# Altium PCB PCB1.PcbDoc
Units mm, origin at the board's own origin, x right, y up, seen from the top; angles counter-clockwise.
Board outline 132.49 x 90.93 mm, 2 copper layers (Top Layer, Bottom Layer); 47 components, 55 nets, 179 pads, 36 vias.
Unrouted connection lines stored in the file: 1.
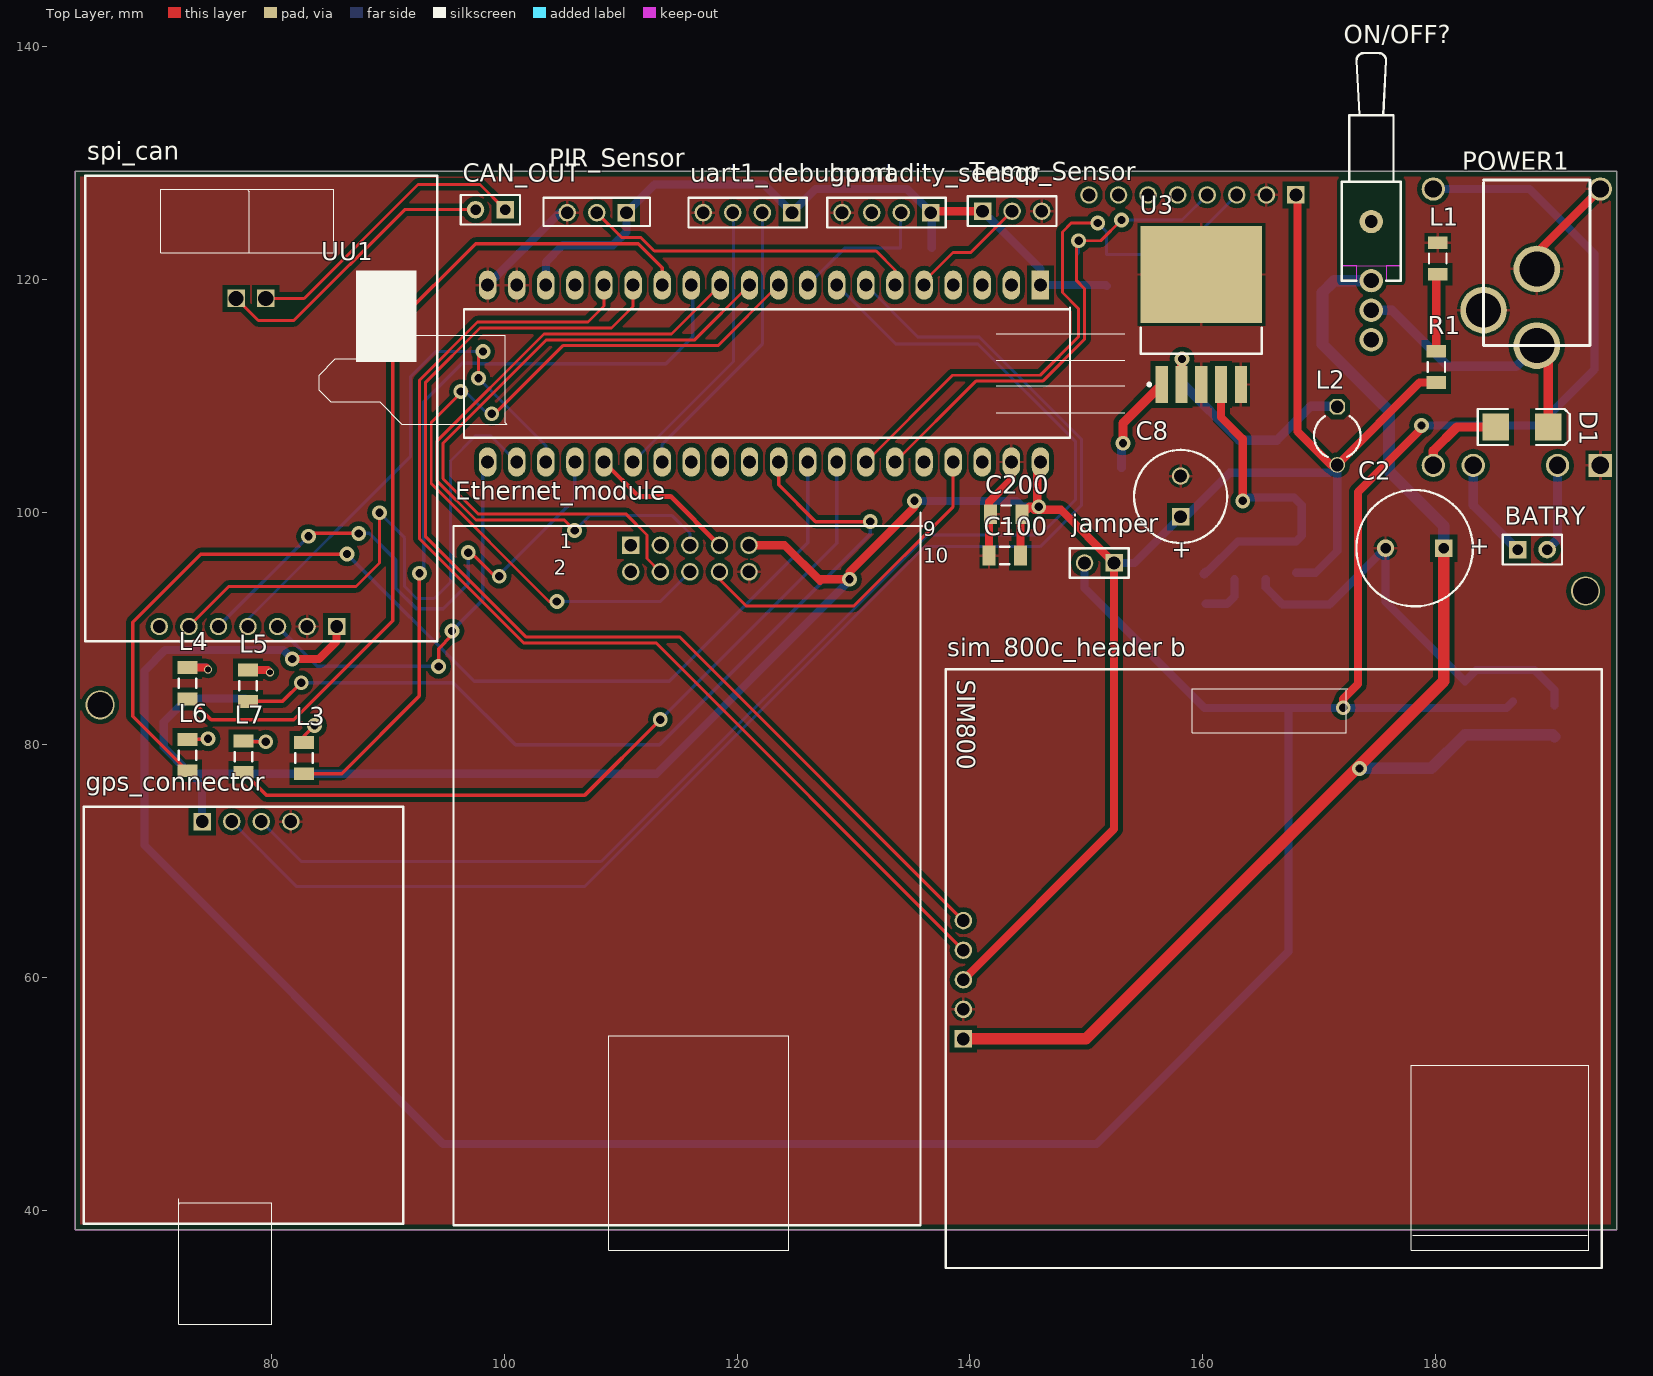
[diagram p0: Top Layer view]
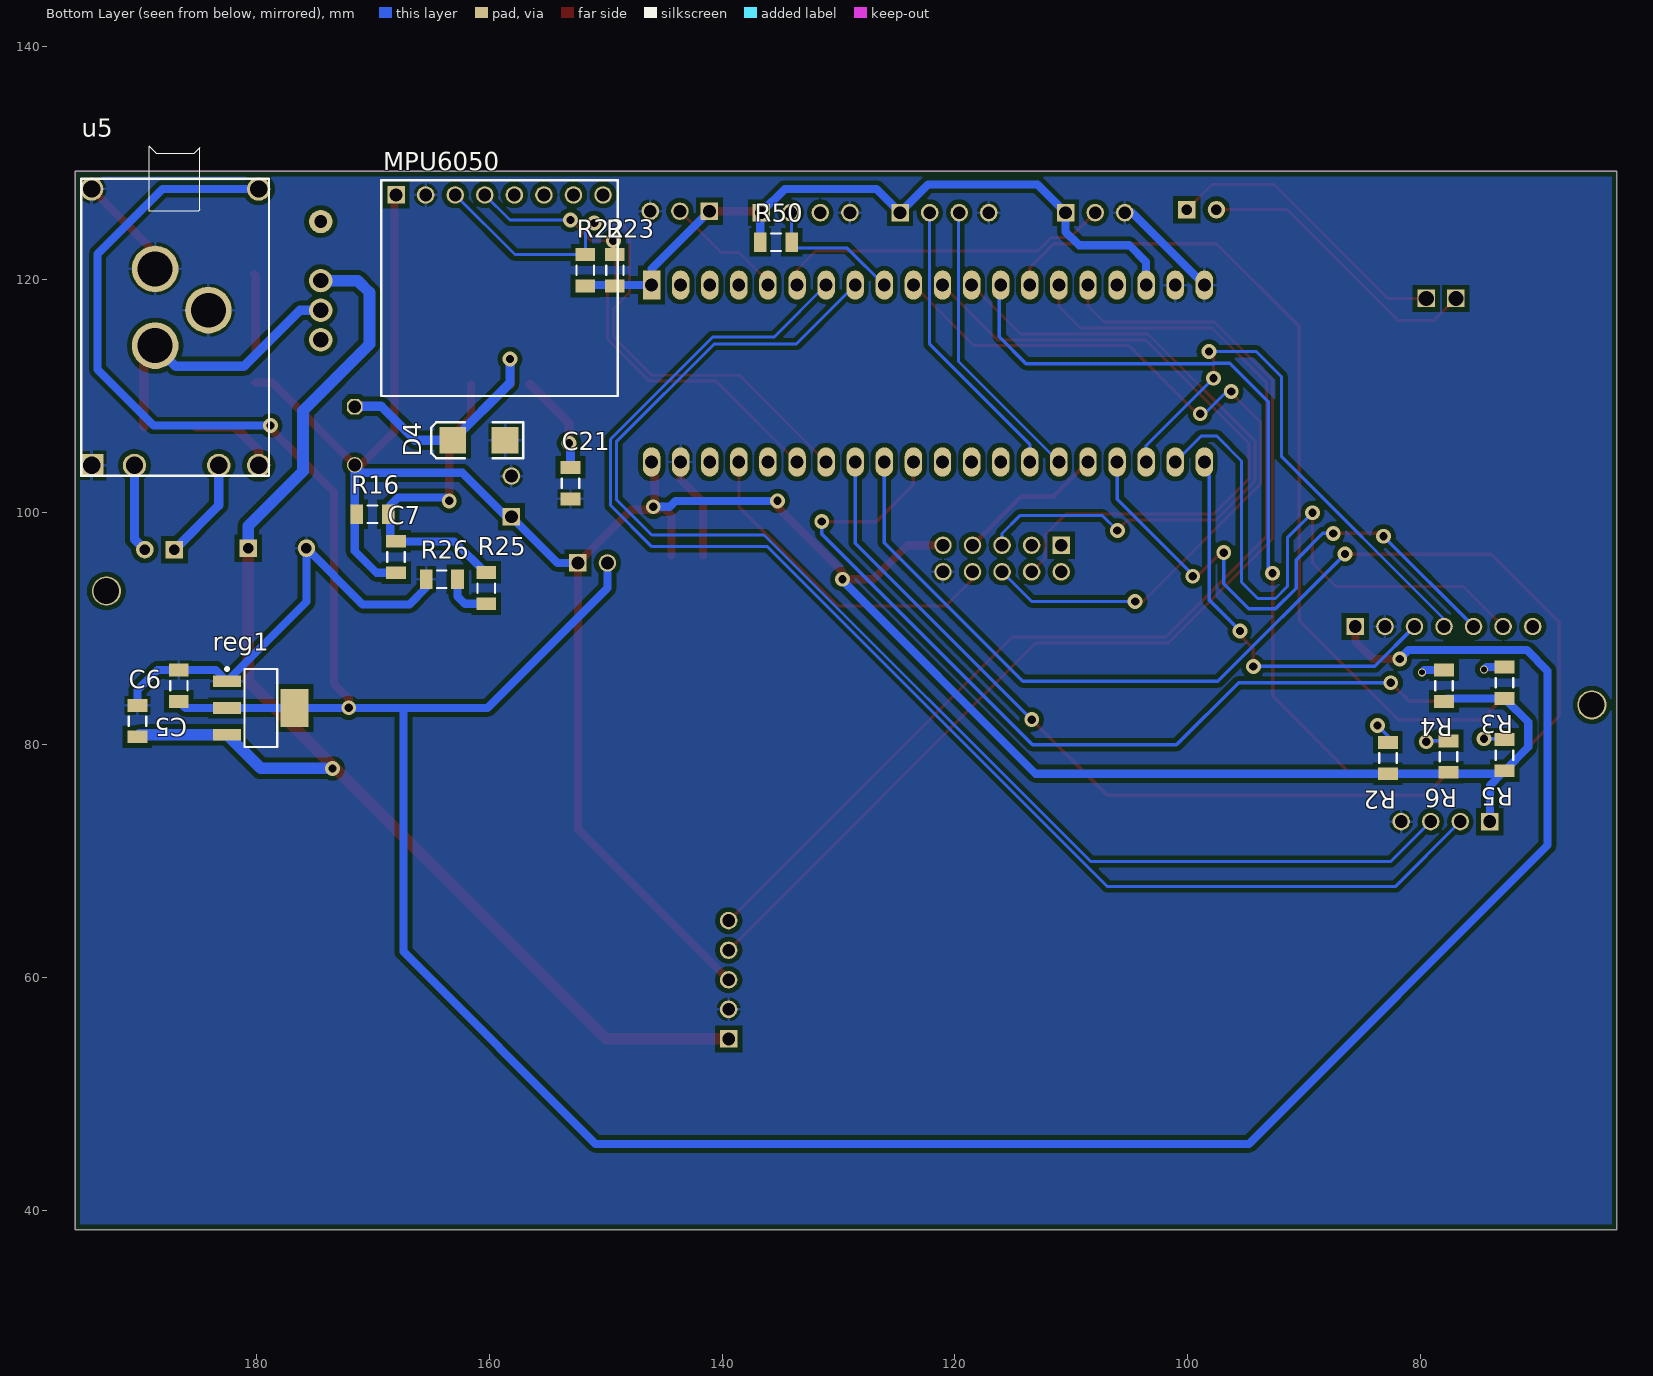
[diagram p1: Bottom Layer view, seen from below]

## Layer stack, top to bottom
Top Solder: solder mask 0.0102, Solder Resist, Dk 3.5
Top Layer: signal copper 0.0356
Dielectric 1: dielectric 0.32, FR-4, Dk 4.8
Bottom Layer: signal copper 0.0356
Bottom Solder: solder mask 0.0102, Solder Resist, Dk 3.5

## Board outline
63.119,38.354 63.119,129.286 195.608,129.286 195.608,38.354

## Design rules (kind name [scope] priority, off if disabled: settings)
Clearance Clearance_2 [InNamedPolygon('1')] p1: gap=0.4 ignorepadtopadclearanceinfootprint=FALSE
Clearance Clearance_1 [InNamedPolygon('Top Layer-No Net')] p2: gap=0.4 ignorepadtopadclearanceinfootprint=FALSE
Clearance [All] p3: gap=0.254 ignorepadtopadclearanceinfootprint=FALSE except(0: Arc-Hole Track-Hole SMDPad-Hole THPad-Hole Via-Hole Fill-Hole Poly-Hole Region-Hole Text-Hole)
PolygonConnect [All] p1: connectstyle=Relief reliefconductorwidth=0.254 reliefentries=4 polygonreliefangle="90 Angle" airgapwidth=0.254
RoutingVias [All] p1: holewidth=0.711 width=1.27 viastyle="Through Hole" minholewidth=0.711 minwidth=1.27 maxholewidth=0.711 maxwidth=1.27
SolderMaskExpansion [All] p1: expansion=0.102
Width Width_1 [InNet('GND') OR InNet('3.3V')   OR InNet('VBAT')  OR InNet('V12')] p1: maxlimit=1 minlimit=0.4 preferedwidth=0.8 minimp=50.000000 maximp=50.000000 favimp=50.000000
Width [All] p2: maxlimit=1 minlimit=0.254 preferedwidth=0.8 minimp=50.000000 maximp=50.000000 favimp=50.000000
30 further rules are at their usual default settings.

## Components (designator, comment, footprint, x,y, rotation, side; value= is the part's Value field where it differs from the comment)
BATRY "BATTRY" HDR1X2#1 187.071,96.774 r0 top
C2 "470uF 16V" F 178.221,96.901 r180 top value=470uF
C5 "Cap Semi" C1206 186.69,85.09 r90 bottom value=22uF
C6 "PC1" C1206 190.246,82.042 r90 bottom value=10uF
C7 "15nF" 1206 168.021,96.139 r270 bottom
C8 "220 μF; 25 V" E 158.115,101.346 r90 top value=100uF
C21 "100nF" 1206 153.035,102.489 r270 bottom
C100 "100nF" 1206 143.002,96.266 r180 top
C200 "100nF" 1206 143.129,99.822 r180 top
CAN_OUT "can_OUT" HDR1X2#1 100.076,125.984 r180 top
D1 "Diode" SMB 187.452,107.315 r0 top
D4 "SM5822" SMB 160.909,106.172 r0 bottom
Ethernet_module "Ethernet_module" ethernet_module 119.38,93.726 r0 top
gps_connector "gps_connector" GPS_PORT_MODULE 74.041,73.406 r0 top
humadity_sensor "humadity_sensor" HDR1X4 136.652,125.73 r180 top
jamper "jamper" HDR1X2#2 152.4,95.631 r180 top
L1 "LED2" C1206 180.213,121.793 r90 top
L2 "68uH 3.1A (47 33)" CAPR5-4X5 171.577,106.553 r270 top value=10mH
L3 "LED2" C1206 82.804,78.867 r270 top
L4 "LED2" C1206 72.771,85.297 r270 top
L5 "LED2" C1206 77.978,85.09 r270 top
L6 "LED2" C1206 72.771,79.121 r270 top
L7 "LED2" C1206 77.597,78.994 r270 top
MPU6050 "MPU6050" mpu6050 168.021,127.254 r180 bottom
ON/OFF? "SW-SPDT" TL36WW15050 174.498,119.888 r90 top
PIR_Sensor "PIR_Sensor" "PIR_MODULE - CONNECTOR" 115.824,125.857 r180 top
POWER1 "POWER" POWERIN 188.715,120.893 r0 top
R1 "1K" 1206 180.086,112.475 r90 top
R2 "330" 1206 82.804,78.867 r90 bottom
R3 "330" 1206 72.771,85.344 r90 bottom
R4 "330" 1206 77.978,85.09 r90 bottom
R5 "330" 1206 72.771,79.121 r90 bottom
R6 "330" 1206 77.597,78.994 r90 bottom
R16 "3.3k; 1%" 1206 170.053,99.822 r180 bottom
R22 "1K" 1206 151.765,120.777 r90 bottom
R23 "1K" 1206 149.225,120.777 r90 bottom
R25 "10k; 1%" 1206 160.274,93.472 r270 bottom
R26 "10k; 1%" 1206 164.084,94.234 r0 bottom
R50 "5.6k" 1206 135.382,123.19 r180 bottom
reg1 "ams1117-5" ams 179.716,83.185 r180 bottom
"sim_800c_header b" "sim_800c_header b" SIM800_MODULE 190.119,62.357 r90 top
spi_can "spi module" SPI_CAN 85.598,90.17 r180 top
Temp_Sensor "Temp_Sensor" HDR1X3 141.097,125.857 r0 top
U3 "LM2596S-ADJ" TS5B_N 159.893,116.967 r90 top
u5 "charger" CHARGER 192.151,108.839 r180 bottom
uart1_debugport "uart1_debugport" HDR1X4 124.714,125.73 r180 top
UU1 "STM32F103C8T6" header_board_st_40 146.071,119.507 r270 top

## Footprints (in the part's own frame and the unit in brackets; to place one, negate y for a bottom-side part, rotate by r counter-clockwise, add the part's x,y. Pads: shape width x height; smd on the part's side, far side on the other; paste and mask are expansions set on the pad)
1206 [mm] "Chip Capacitor, Body 3.2x1.6mm, IPC High Density"
  rect 1.1x1.7 smd: 1(-1.35,0) 2(1.35,0)
  silkscreen extent -0.4,-0.75 0.4,0.75, body extent -1.7,-0.9 1.7,0.9, height 1.3
ams [mm]
  rect 2.4x1 smd: 1(-2.831,2.285) 2(-2.831,-0.015) 3(-2.831,-2.315)
  rect 2.4x3.3 smd: 4(2.969,-0.015)
  silkscreen extent -2.96,-3.37 1.47,3.46, body extent -1.78,-3.37 1.92,3.33, height 1.7
C1206 [mm] "Chip Capacitor, Body 3.2x1.6mm, IPC High Density"
  rect 1.1x1.7 smd: 1(-1.35,0) 2(1.35,0)
  silkscreen extent -0.4,-0.75 0.4,0.75, body extent -1.7,-0.9 1.7,0.9, height 1.3
CAPR5-4X5 [mm]
  oct 1.35x1.35 hole 1.1: 1(-2.5,0)
  round 1.35 hole 1.1: 2(2.5,0)
  silkscreen extent -1.69,-2 1.82,2
CHARGER [mm]
  round 2 hole 1.5: 1(-2.032,18.923) 2(12.319,18.923) 3(12.319,-4.826) 4(8.89,-4.826) 5(1.651,-4.826)
  rect 2x2 hole 1.5: 6(-2.032,-4.826)
  silkscreen extent -2.92,-5.72 13.21,22.61
E [mm]
  rect 1.5x1.5 hole 1.1: 1(-1.75,0)
  round 1.5 hole 1.1: 2(1.75,0)
  silkscreen extent -4,-4 4,4
ethernet_module [mm] "Connector; Header; 5x2 Position"
  rect 1.5x1.5 hole 1.1: 1(-8.509,3.429)
  round 1.5 hole 1.1: 2(-8.509,1.143) 3(-5.969,3.429) 4(-5.969,1.143) 5(-3.429,3.429) 6(-3.429,1.143) 7(-0.889,3.429) 8(-0.889,1.143) 9(1.651,3.429) 10(1.651,1.143)
  silkscreen extent -23.75,-57.15 16.51,6.22
F [mm]
  rect 1.5x1.5 hole 0.9: 1(-2.5,0)
  round 1.5 hole 0.9: 2(2.5,0)
  silkscreen extent -5,-5 5,5
GPS_PORT_MODULE [mm] "Connector; Header; 4 Position"
  rect 1.5x1.5 hole 1.1: 1(0,0)
  round 1.5 hole 1.1: 2(2.54,0) 3(5.08,0) 4(7.62,0)
  silkscreen extent -10.16,-43.18 17.27,1.27
HDR1X2#1 [mm] "Connector; Header; 2 Position"
  rect 1.5x1.5 hole 0.9: 1(0,0)
  round 1.5 hole 0.9: 2(2.54,0)
  silkscreen extent -1.27,-1.27 3.81,1.27
HDR1X2#2 [mm] "Connector; Header; 2 Position"
  rect 1.5x1.5 hole 1.1: 1(0,0)
  round 1.5 hole 1.1: 2(2.54,0)
  silkscreen extent -1.27,-1.27 3.81,1.27
HDR1X3 [mm] "Connector; Header; 3 Position"
  rect 1.5x1.5 hole 1.1: 1(0,0)
  round 1.5 hole 1.1: 2(2.54,0) 3(5.08,0)
  silkscreen extent -1.27,-1.27 6.35,1.27
HDR1X4 [mm] "Connector; Header; 4 Position"
  rect 1.5x1.5 hole 1.1: 1(0,0)
  round 1.5 hole 1.1: 2(2.54,0) 3(5.08,0) 4(7.62,0)
  silkscreen extent -1.27,-1.27 8.89,1.27
header_board_st_40 [mm]
  rect 2.5x1.5 hole 1.1: 1(0,0)
  oval 2.5x1.5 hole 1.1: 2(0,-2.5) 3(0,-5) 4(0,-7.5) 5(0,-10) 6(0,-12.5) 7(0,-15) 8(0,-17.5) 9(0,-20) 10(0,-22.5) 11(0,-25) 12(0,-27.5) 13(0,-30) 14(0,-32.5) 15(0,-35) 16(0,-37.5) 17(0,-40) 18(0,-42.5) 19(0,-45) 20(0,-47.5) 21(15.2,-47.5) 22(15.2,-45) 23(15.2,-42.5) 24(15.2,-40) 25(15.2,-37.5) 26(15.2,-35) 27(15.2,-32.5) 28(15.2,-30) 29(15.2,-27.5) 30(15.2,-25) 31(15.2,-22.5) 32(15.2,-20) 33(15.2,-17.5) 34(15.2,-15) 35(15.2,-12.5) 36(15.2,-10) 37(15.2,-7.5) 38(15.2,-5) 39(15.2,-2.5) 40(15.2,0)
  silkscreen extent 1.96,-61.98 13.12,7.24
mpu6050 [mm] "Connector; Header; 8 Position"
  rect 1.5x1.5 hole 1.1: 1(0,0)
  round 1.5 hole 1.1: 2(2.54,0) 3(5.08,0) 4(7.62,0) 5(10.16,0) 6(12.7,0) 7(15.24,0) 8(17.78,0)
  silkscreen extent -1.27,-17.27 19.05,1.27
"PIR_MODULE - CONNECTOR" [mm] "Connector; Header; 3 Position"
  rect 1.5x1.5 hole 1.1: 1(5.334,0.127)
  round 1.5 hole 1.1: 2(7.874,0.127) 3(10.414,0.127)
  silkscreen extent 3.3,-1.14 12.45,1.27
POWERIN [mm]
  round 4 hole 3: 1(0.007,-6.593) 2(0.007,0.011) 3(-4.565,-3.545)
  silkscreen extent -4.56,-6.59 4.58,7.63
SIM800_MODULE [mm] "Connector; Header; 5 Position"
  rect 1.5x1.5 hole 1.1: 1(-7.62,50.673)
  round 1.5 hole 1.1: 2(-5.08,50.673) 3(-2.54,50.673) 4(0,50.673) 5(2.54,50.673)
  silkscreen extent -27.31,-4.19 24.13,52.2
SMB [mm]
  rect 2.3x2.3 smd: 1(-2.25,0) 2(2.25,0)
  silkscreen extent -3.8,-1.55 4.1,1.55
SPI_CAN [mm] "Connector; Header; 8 Position"
  rect 1.5x1.5 hole 1.1: 1(0,0)
  round 1.5 hole 1.1: 2(2.54,0) 3(5.08,0) 4(7.62,0) 5(10.16,0) 6(12.7,0) 7(15.24,0)
  rect 1.5x1.5 hole 1.3: 8(6.096,-28.194) 9(8.636,-28.194)
  silkscreen extent -8.64,-38.73 21.59,1.27
TL36WW15050 [mm] "Switch; 4 Leads"
  round 2 hole 1.3: 1(0,0) 2(-2.54,0) 3(-5.08,0)
  round 2 hole 1.1: M(5.08,0)
  Top Layer keep-out region: 1.27,2.54 1.27,-2.54 8.509,-2.54 8.509,2.54
  Top Layer keep-out region: 0,2.54 0,1.27 1.27,1.27 1.27,2.54
  Top Layer keep-out region: 0,-1.27 0,-2.54 1.27,-2.54 1.27,-1.27
  silkscreen extent 0,-2.54 19.56,2.54
TS5B_N [mm]
  rect 3.2x1.05 smd: 1(-6,3.4) 2(-6,1.7) 3(-6,0) 4(-6,-1.7) 5(-6,-3.4)
  rect 8.3x10.45 smd: 6(3.45,0)
  silkscreen extent -6.12,-5.2 -1.1,5.2, body extent -3.35,-5.2 6.05,5.2, height 4.65

## Part data
BATRY CAN_OUT jamper: library part "Header 2", "Header, 2-Pin", LatestRevisionDate=17-Jul-2002, LatestRevisionNote="Re-released for DXP Platform.", Publisher="Altium Limited"
C2: library part 94SS477X0004FBP, "Solid Aluminum Capacitor with Organic Semiconductor Electrolyte: 470uF, 4V, Bulk Pack", ComponentLink1Description="Manufacturer Link", ComponentLink1URL=http://www.vishay.com/, ComponentLink2Description=Datasheet, ComponentLink2URL=http://www.vishay.com/docs/90008/94ss.pdf, DatasheetDocument=23-May-2001, DrillSize="Nominal, Rounded to the nearest 0.1mm", Note="Part Numbers shown are for ± 20% capacitance tolerance (X0).", PackageReference=F, PCB_Layout="Complies with Manufacturer's Recommendation.", Published=19-Mar-2004, Publisher="Altium Limited"
C5: "Capacitor (Semiconductor SIM Model)", LatestRevisionDate=29-May-2009, LatestRevisionNote="IPC-7351 Footprint Added.", PackageDescription="Chip Capacitor", PackageReference=C1206, Published=8-Jun-2000, Publisher="Altium Limited"
C6: library part "Cap Semi", "Capacitor (Semiconductor SIM Model)", LatestRevisionDate=29-May-2009, LatestRevisionNote="IPC-7351 Footprint Added.", PackageDescription="Chip Capacitor", PackageReference=C1206, Published=8-Jun-2000, Publisher="Altium Limited"
C7: library part Cap, "Capacitor", LatestRevisionDate=17-Jul-2002, LatestRevisionNote="Re-released for DXP Platform.", PackageDescription="Radial Cap, Thru-Hole; 2 Leads; 0.3 in Pin Spacing", PackageReference=RAD-0.3, Published=8-Jun-2000, Publisher="Altium Limited", STATE=NOT-AVAILABLE, TYPE=tantalum
C8: library part 94SH107X0016EBP, "Solid Aluminum Capacitor with Organic Semiconductor Electrolyte: 100uF, 16V, Bulk Pack", ComponentLink1Description="Manufacturer Link", ComponentLink1URL=http://www.vishay.com/, ComponentLink2Description=Datasheet, ComponentLink2URL=http://www.vishay.com/docs/90006/94sh.pdf, DatasheetDocument=23-May-2001, DrillSize="Nominal, Rounded to the nearest 0.1mm", Note="Part Numbers shown are for ± 20% capacitance tolerance (X0).", PackageReference=E, PCB_Layout="Complies with Manufacturer's Recommendation.", Published=19-Mar-2004, Publisher="Altium Limited"
C21 C100 C200: library part Cap-Bipolar, "Bipolar Capacitor", Voltage=100V, Adding Date=1387/12/20, Designer="Saeid Jorablo", Organazation=ControTec
D1: "Default Diode", Code_JEDEC=DO-214-AB, LatestRevisionDate=17-Jul-2002, LatestRevisionNote="Re-released for DXP Platform.", PackageDescription="DO-214-AB/SMC; 2 C-Bend Leads; Body 7.9 x 5.9 mm, inc. leads (LxW)", PackageReference=SMC, PackageVersion=Sep-1996, Published=8-Jun-2000, Publisher="Altium Limited"
D4: library part "D Schottky", "Schottky Diode", Code_JEDEC=DO-214-AA, LatestRevisionDate=17-Jul-2002, LatestRevisionNote="Re-released for DXP Platform.", PackageDescription="DO-214-AA/SMB; 2 C-Bend Leads; Body 5.3 x 3.6 mm, inc. leads (LxW)", PackageReference=SMB, Published=8-Jun-2000, Publisher="Altium Limited"
Ethernet_module: library part "Header 5X2", "Header, 5-Pin, Dual row", LatestRevisionDate=17-Jul-2002, LatestRevisionNote="Re-released for DXP Platform.", Publisher="Altium Limited"
gps_connector humadity_sensor uart1_debugport: library part "Header 4", "Header, 4-Pin", LatestRevisionDate=17-Jul-2002, LatestRevisionNote="Re-released for DXP Platform.", Publisher="Altium Limited"
L1 L3 L4 L5 L6 L7: "Typical RED, GREEN, YELLOW, AMBER GaAs LED", LatestRevisionDate=17-Jul-2002, LatestRevisionNote="Re-released for DXP Platform.", PackageDescription="SM LED; 2 Flat Leads", PackageReference=3.2X1.6X1.1, PackageVersion=Feb-2002, Published=8-Jun-2000, Publisher="Altium Limited"
L2: library part Inductor, "Inductor", Code_IEC=1005, Code_JEITA=0402, LatestRevisionDate=29-May-2009, LatestRevisionNote="IPC-7351 Footprint Added.", PackageDescription="Chip Inductor", PackageReference=0402-A, Published=8-Jun-2000, Publisher="Altium Limited"
MPU6050: library part "Header 8", "Header, 8-Pin", LatestRevisionDate=17-Jul-2002, LatestRevisionNote="Re-released for DXP Platform.", Publisher="Altium Limited"
ON/OFF?: "SPDT Subminiature Toggle Switch, Right Angle Mounting, Vertical Actuation", ComponentLink1Description="Manufacturer Link", ComponentLink1URL=http://www.apem.com, DatasheetVersion=05-Dec-2000, LatestRevisionDate=17-Dec-2003, LatestRevisionNote="Schematic revised, PCB Footprint replaced.", PackageDescription="Switch; 4 Leads", PackageReference=TL36WW15050, Published=24-Mar-1999, Publisher="Altium Limited"
PIR_Sensor Temp_Sensor: library part "Header 3", "Header, 3-Pin", LatestRevisionDate=17-Jul-2002, LatestRevisionNote="Re-released for DXP Platform.", Publisher="Altium Limited"
POWER1: library part PWR2.5, "Low Voltage Power Supply Connector", ComponentLink1Description="Manufacturer Link", ComponentLink1URL=http://domino.kycon.com/internet/Products.html, DatasheetDocument=09-May-2002, Published=17-Dec-2003, Publisher="Altium Limited"
R1 R2 R3 R4 R5 R6 R16 R22 R23 R25 R26 R50: library part Resistor, "Resistor"
reg1: library part ams1117-3.3
U3: "SIMPLE SWITCHER® Power Converter 150 KHz 3A Step-Down Voltage Regulator, 5-pin TO-263", Manufacturer="National Semiconductor", PackageTopMarking="NSUZXYTTE#*LM2596S*-ADJ P+", PowerWise=N, Supplier Part Number 1=1523864, Code_JEDEC=MO-169-AB, ComponentLink1Description="LM2596 Datasheet", ComponentLink1URL=http://www.national.com/ds/LM/LM2596.pdf, ComponentLink2Description="LM2596 Web Page", ComponentLink2URL=http://www.national.com/pf/LM/LM2596.html, ComponentLink3Description="TS5B Package Page", ComponentLink3URL=http://www.national.com/packaging/folders/ts5b.html, CompType=Switcher, DatasheetVersion=May-2002, PackageDescription="TO-263, Molded, .400 x .390 x .180in, 5 Lead, .067in Pitch, Surface Mount", PackageReference=TS5B, PackageVersion="revD, Apr-2005", PartNumber=LM2596S-ADJ, PinCount=5, Published=4-Dec-2008, Publisher="Altium Limited", RoHS=N, Supplier 1=Farnell, Supplier 2=Farnell, Supplier Part Number 2=9494367
u5: library part 03962A
UU1: "ARM Cortex-M3 32-bit MCU, 64 KB Flash, 20 KB Internal RAM, 37 I/Os, 48-pin LQFP, -40 to 85 degC, Tray", I/Os (High Current)=37, Operating Frequency(F) (Processor speed) (MHz)=72, Supplier Part Number 1=497-6063-ND, Supply Voltage(Vcc) min (V)=2, A/D Converter="2x12-bit (10 Channel)", ComponentLink1Description="Manufacturer URL", ComponentLink1URL=http://www.st.com/web/en/home.html, ComponentLink2Description=Datasheet, ComponentLink2URL=http://www.st.com/st-web-ui/static/active/en/resource/technical/document/datasheet/CD00161566.pdf, ComponentLink3Description="Package Specification", ComponentLink3URL=http://www.st.com/st-web-ui/static/active/en/resource/technical/document/datasheet/DM00058181.pdf, Core="ARM Cortex-M3", DatasheetVersion="Rev. 16", FLASH Size (Prog) (kB)=64, Internal RAM Size (kB)=20, Mounting Technology="Surface Mount", PackageDescription="48-Pin Low Profile Quad Flat Package, 7 x 7 mm Body, 0.5 mm Pitch", PackageReference=LQFP48, PackageVersion="Rev. 6, 06/2013", Packing=Tray, PartNumber=STM32F103C8T6, Supplier 1=Digi-Key, Supplier 2=Farnell, Supplier 3=Newark, Supplier 4=Newark, Supplier 5=Mouser, Supplier Part Number 2=1447637, Supplier Part Number 3=59M2182, Supplier Part Number 4=57P1222, Supplier Part Number 5=511-STM32F103C8T6

## Free pads (board coordinates)
  round 2.5 hole 2.2: 7(65.278,83.439) 8(192.913,93.218)

## Via types
v1: diameter 1.27, hole 0.711, Top Layer to Bottom Layer, 34 vias
v2: diameter 0.7, hole 0.5, Top Layer to Bottom Layer, 2 vias

## Nets (pads, with @x,y where several pads share a name; then routed paths per layer and width w, separated by ;. In a path a pad name is that pad's centre, name@x,y a point inside that pad or via, vN(x,y) a via of type N, cw(c..) or ccw(c..) an arc to the next point about the centre after c; other vN are vias at no path point)
3.3V: "sim_800c_header b.3" C7.2 C8.1 C100.1 C200.1 Ethernet_module.9 gps_connector.1 humadity_sensor.1 jamper.1 L2.2 MPU6050.1 PIR_Sensor.1 R1.1 R2.1 R3.1 R4.1 R5.1 R6.1 R16.1 R22.1 R23.1 R50.1 Temp_Sensor.1 uart1_debugport.1 UU1.1 UU1.18 UU1.40 | length 303.7
  Top Layer w0.7: Ethernet_module.9 124.079,97.155 127.127,94.107 127.254,94.234 v1(129.667,94.234) 129.667,94.869 135.255,100.457 v1(135.255,100.965) ; humadity_sensor.1 136.779,125.857 Temp_Sensor.1 ; 139.446,59.817 152.4,72.771 jamper.1 147.828,100.203 145.542,100.203 v1@145.796,100.457 ; C100.1 C200.1@144.352,99.695 ; C200.1 145.114,100.457 v1@145.796,100.457 ; v1(145.923,100.457) v1@145.796,100.457 ; UU1.40 145.796,104.032 v1@145.796,100.457 ; MPU6050.1@168.148,127.381 168.148,106.934 171.029,104.053 L2.2 178.649,111.125 R1.1
  Bottom Layer w0.7: gps_connector.1 74.041,76.501 R5.1@73.025,77.517 ; R4.1 77.724,83.994 R3.1 70.739,81.962 70.739,79.803 R5.1 R5.1@73.025,77.517 ; UU1.18 103.571,121.478 105.029,122.936 109.347,122.936 110.49,124.079 PIR_Sensor.1 112.903,128.143 122.301,128.143 uart1_debugport.1 126.746,127.762 134.62,127.762 humadity_sensor.1 136.732,125.65 R50.1 R50.1@136.732,122.682 ; v1(129.667,94.234) 129.667,94.107 113.077,77.517 R2.1 R5.1@73.025,77.517 ; v1(135.255,100.965) 144.018,100.965 144.526,100.457 v1(145.923,100.457) ; Temp_Sensor.1 146.071,120.883 ; UU1.1 151.685,119.507 R22.1 ; jamper.1 154.15,95.631 C8.1 158.524,99.596 162.306,103.378 170.902,103.378 L2.2 171.577,96.647 169.719,94.789 C7.2
5V: C5.1 jamper.2 reg1.2 reg1.4 spi_can.1 u5.2 | length 284.9
  Top Layer w0.7: v1(81.788,87.376) 84.074,87.376 85.598,88.9 spi_can.1 ; v1(172.085,83.185) 172.085,83.947 173.355,85.217 173.355,101.727 178.816,107.188 v1(178.816,107.442)
  Bottom Layer w0.7: v1(81.788,87.376) 81.026,88.138 70.866,88.138 69.088,86.36 69.088,71.374 94.742,45.72 150.876,45.72 167.386,62.23 167.386,83.17 ; jamper.2 149.86,93.472 160.162,83.17 167.386,83.17 ; v1@172.085,82.931 v1@172.085,83.17 ; v1(172.085,83.185) v1@172.085,83.17 ; v1(178.816,107.442) 188.849,107.442 193.675,112.268 193.675,122.174 188.087,127.762 u5.2 ; C5.1 186.12,83.17 reg1.2 reg1.4 v1@172.085,83.17 ; 167.386,83.17 v1@172.085,83.17
12V: "sim_800c_header b.1" C2.1 C6.1 ON/OFF?.1 reg1.3 | length 114.4
  Top Layer w1: 139.446,54.737 149.987,54.737 180.721,85.471 C2.1
  Bottom Layer w1: v1(173.482,77.978) 179.655,77.978 reg1.3 190.068,80.87 C6.1 ; ON/OFF?.1 171.323,119.888 170.307,118.872 170.307,114.427 176.022,108.712 176.022,103.505 180.721,98.806 C2.1
ADO: MPU6050.7
BATTRY+: BATRY.1 u5.4 | length 8.8
  Bottom Layer w0.8: u5.4 183.261,100.584 BATRY.1
BATTRY-: BATRY.2 u5.5 | length 7.6
  Bottom Layer w0.8: BATRY.2 190.5,97.663 u5.5
CAN+: CAN_OUT.1 spi_can.8 | length 25.5
  Top Layer w0.254: spi_can.8 82.804,118.364 92.583,128.143 97.917,128.143 CAN_OUT.1
CAN-: CAN_OUT.2 spi_can.9 | length 25.3
  Top Layer w0.254: spi_can.9 78.867,116.459 81.915,116.459 91.44,125.984 CAN_OUT.2
CAN_RX: UU1.28
CAN_TX: UU1.29
CLK: Ethernet_module.1
CS: Ethernet_module.7 UU1.25 | length 12.9
  Top Layer w0.4: UU1.25 111.532,101.346 114.3,101.346 Ethernet_module.7
CS2: spi_can.3 UU1.21 | length 34.6
  Top Layer w0.3: v1(94.361,86.741) 94.361,88.265 95.504,89.408 v1(95.504,89.789)
  Bottom Layer w0.3: spi_can.3 83.947,86.741 v1(94.361,86.741) ; v1(95.504,89.789) 98.171,92.456 98.171,103.907 UU1.21
CS3: L4.2 UU1.14 | length 75.6
  Top Layer w0.3: L4.2 73.025,83.947 74.803,82.169 81.915,82.169 90.424,90.678 90.424,115.951 97.536,123.063 111.506,123.063 113.571,120.998 UU1.14
CS4: L5.2 UU1.31 | length 76
  Top Layer w0.3: L5.2 80.946,83.74 v1(82.55,85.344) ; UU1.31 123.571,102.362 126.746,99.187 v1(131.445,99.187)
  Bottom Layer w0.3: v1(82.55,85.344) 95.631,85.344 100.965,80.01 113.339,80.01 131.445,98.116 v1(131.445,99.187)
CS5: L6.2 UU1.32 | length 91.5
  Top Layer w0.3: L6.2 68.072,82.47 68.072,90.551 73.914,96.393 v1(86.487,96.393)
  Bottom Layer w0.3: v1(86.487,96.393) 97.409,85.471 114.173,85.471 126.071,97.369 UU1.32
CS6: L7.2 UU1.33 | length 67.7
  Top Layer w0.3: L7.2 79.549,75.692 106.934,75.692 v1(113.411,82.169)
  Bottom Layer w0.3: v1(113.411,82.169) 128.571,97.329 UU1.33
DATA_humadity: humadity_sensor.2 R50.2 UU1.9 | length 12.4
  Bottom Layer w0.254: UU1.9 129.246,122.682 134.032,122.682 R50.2 134.032,125.65 humadity_sensor.2
Debug_RX1: uart1_debugport.2 UU1.27 | length 25
  Bottom Layer w0.254: UU1.27 113.571,105.824 122.174,114.427 122.174,118.511 122.202,118.539 122.202,120.475 122.174,120.503 uart1_debugport.2
Debug_TX1: uart1_debugport.3 UU1.26 | length 25.1
  Bottom Layer w0.254: UU1.26 119.702,112.938 119.702,125.73 uart1_debugport.3
GND: "sim_800c_header b.2" C2.2 C5.2 C6.2 C8.2 C21.2 C100.2 C200.2 D4.1 Ethernet_module.10 gps_connector.4 humadity_sensor.4 L1.2 MPU6050.2 PIR_Sensor.3 POWER1.2 POWER1.3 R26.2 reg1.1 spi_can.2 Temp_Sensor.3 U3.3 U3.5 U3.6 u5.1 u5.6 uart1_debugport.4 UU1.19 UU1.20 UU1.39 | length 65.4
  Top Layer w0.7: C100.2 141.652,100.885 143.571,102.804 UU1.39 ; POWER1.2 188.722,122.301 u5.1
  Bottom Layer w0.7: UU1.20 104.794,125.73 PIR_Sensor.3 ; R26.2 165.434,93.519 166.878,92.075 170.895,92.075 C2.2 175.721,92.296 reg1.1 183.517,86.44 C5.2 188.515,86.44 190.246,84.709 C6.2
GPS_rx: gps_connector.2 UU1.7 | length 118.4
  Bottom Layer w0.254: gps_connector.2@76.708,73.279 82.169,67.818 106.89,67.818 136.1,97.028 146.05,97.028 149.606,100.584 149.606,106.255 140.799,115.062 135.516,115.062 UU1.7
GPS_tx: gps_connector.3 UU1.8 | length 115.2
  Bottom Layer w0.254: gps_connector.3@79.248,73.279 82.55,69.977 108.331,69.977 136.398,98.044 146.05,98.044 149.098,101.092 149.098,106.045 140.716,114.427 133.651,114.427 UU1.8
INT: MPU6050.8
LED1: L3.2 UU1.13 | length 68.1
  Top Layer w0.3: L3.2 86.026,77.517 92.71,84.201 v1(92.71,94.742)
  Bottom Layer w0.3: v1(92.71,94.742) 93.091,95.123 93.091,109.474 96.393,112.776 97.718,112.776 97.741,112.753 113.896,112.753 116.205,115.062 116.205,119.373 UU1.13
NC: humadity_sensor.3
NetC7_1: C7.1 R16.2 R25.1 U3.4 | length 28.6
  Top Layer w0.7: U3.4 161.593,108.155 163.449,106.299 v1(163.449,100.965)
  Bottom Layer w0.7: R25.1 160.354,94.822 163.021,97.489 C7.1 168.529,97.997 168.529,100.584 167.847,101.266 163.75,101.266 v1(163.449,100.965)
  Bottom Layer w0.8: R25.1@160.147,94.695 R25.1
NetC21_1: C21.1 U3.1 | length 8.6
  Top Layer w0.8: v1(153.162,105.918) 153.162,107.636 U3.1
  Bottom Layer w0.8: C21.1 153.035,105.791 v1(153.162,105.918)
NetD4_2: D4.2 L2.1 U3.2 | length 20.9
  Top Layer w0.8: U3.2 158.193,113.108 v1(158.242,113.157)
  Bottom Layer w0.8: v1(158.242,113.157) 158.242,111.089 D4.2 166.37,106.172 169.291,109.093 171.537,109.093 L2.1
NetL1_1: L1.1 R1.2 | length 6.7
  Top Layer w0.7: R1.2 180.086,120.316 L1.1
NetL3_1: L3.1 R2.2 | length 3.6
  Top Layer w0.3: L3.1 82.804,80.772 v1(83.693,81.661)
  Bottom Layer w0.3: R2.2 82.804,80.772 v1(83.693,81.661)
NetL4_1: L4.1 R3.2 | length 3.7
  Top Layer w0.7: L4.1 74.389,86.647 v2(74.549,86.487)
  Bottom Layer w0.7: R3.2 74.342,86.694 v2(74.549,86.487)
NetL5_1: L5.1 R4.2 | length 4
  Top Layer w0.7: L5.1 79.676,86.44 v2(79.883,86.233)
  Bottom Layer w0.7: R4.2 79.676,86.44 v2(79.883,86.233)
NetL6_1: L6.1 R5.2 | length 3.6
  Top Layer w0.3: L6.1 74.502,80.471 v1(74.549,80.518)
  Bottom Layer w0.3: R5.2 72.818,80.518 v1(74.549,80.518)
NetL7_1: L7.1 R6.2 | length 3.9
  Top Layer w0.3: L7.1 77.677,80.264 v1(79.502,80.264)
  Bottom Layer w0.3: R6.2 79.422,80.344 v1(79.502,80.264)
NetR25_2: R25.2 R26.1 | length 4.2
  Bottom Layer w0.7: R25.2 162.099,92.122 162.734,92.757 R26.1
NT: Ethernet_module.2
PIR_DATA: PIR_Sensor.2 UU1.6 | length 29
  Top Layer w0.254: PIR_Sensor.2 110.086,123.594 111.726,123.594 112.892,122.428 131.953,122.428 133.571,120.81 UU1.6
RST_ETHERNET: Ethernet_module.8 UU1.37 | length 29
  Top Layer w0.254: Ethernet_module.8 118.491,94.234 120.777,91.948 130.048,91.948 138.571,100.471 UU1.37
SCL: MPU6050.3 R22.2 UU1.34 | length 52
  Top Layer w0.254: UU1.34 138.524,111.76 146.05,111.76 149.352,115.062 149.352,117.475 147.955,118.872 147.955,124.079 148.717,124.841 v1(151.003,124.841)
  Bottom Layer w0.254: v1(151.003,124.841) 151.765,124.079 R22.2 157.814,122.127 MPU6050.3
SDA: MPU6050.4 R23.2 UU1.35 | length 43.4
  Top Layer w0.254: UU1.35 140.516,111.252 146.26,111.252 149.86,114.852 149.86,119.198 149.181,119.877 149.181,123.146 v1(149.352,123.317) 151.257,123.317 v1(153.035,125.095)
  Bottom Layer w0.254: R23.2 149.352,122.254 v1(149.352,123.317) ; v1(153.035,125.095) 158.242,125.095 MPU6050.4
SIM_RX3: "sim_800c_header b.4" UU1.16 | length 95.3
  Top Layer w0.254: UU1.16 108.571,117.715 107.188,116.332 97.707,116.332 92.71,111.335 92.71,97.707 101.644,88.773 113.03,88.773 139.446,62.357
SIM_TX3: "sim_800c_header b.5" UU1.15 | length 95.5
  Top Layer w0.254: UU1.15 111.071,117.675 109.22,115.824 97.917,115.824 93.218,111.125 93.218,97.917 101.854,89.281 115.062,89.281 139.446,64.897
SPI1_MISO: Ethernet_module.4 UU1.11 | length 58.2
  Top Layer w0.254: Ethernet_module.4 112.268,96.012 112.268,98.044 110.49,99.822 97.79,99.822 94.742,102.87 94.742,105.918 103.632,114.808 116.372,114.808 UU1.11
SPI1_MOSI: Ethernet_module.5 UU1.12 | length 59
  Top Layer w0.254: v1(106.045,98.425) 105.156,99.314 97.58,99.314 94.234,102.66 94.234,106.128 103.422,115.316 114.38,115.316 UU1.12
  Bottom Layer w0.254: v1(106.045,98.425) 107.315,99.695 114.427,99.695 115.951,98.171 Ethernet_module.5
SPI1_SCK: Ethernet_module.6 UU1.10 | length 70.9
  Top Layer w0.254: v1(96.266,110.363) v1@96.393,110.363 ; v1(98.933,108.458) 98.933,108.204 105.029,114.3 118.364,114.3 UU1.10 ; v1(104.521,92.329) 103.846,92.329 93.726,102.449 93.726,107.696 v1@96.393,110.363 ; v1@96.393,110.363 96.603,110.573 96.814,110.363 v1@96.393,110.363
  Bottom Layer w0.254: v1(96.266,110.363) 96.647,110.363 98.425,108.585 98.679,108.839 98.933,108.585 v1(98.933,108.458) ; v1(104.521,92.329) 113.411,92.329 Ethernet_module.6
SPI2_MISO: spi_can.4 UU1.23 | length 46.4
  Top Layer w0.254: v1(97.79,111.506) 97.79,113.411 v1(98.171,113.792)
  Bottom Layer w0.254: spi_can.4 77.978,90.805 91.925,104.752 91.925,111.61 94.107,113.792 v1(98.171,113.792) ; v1(97.79,111.506) 103.571,105.725 UU1.23
SPI2_MOSI: spi_can.5 UU1.24 | length 48.5
  Top Layer w0.3: v1(83.185,97.917) 83.439,98.171 v1(87.503,98.171) ; v1(96.901,96.52) 97.155,96.52 99.187,94.488 v1(99.568,94.488)
  Bottom Layer w0.3: spi_can.5 v1(83.185,97.917) ; v1(87.503,98.171) 88.392,98.171 90.678,95.885 90.678,93.472 92.456,91.694 94.742,91.694 96.901,93.853 v1(96.901,96.52) ; v1(99.568,94.488) 99.568,94.615 106.071,101.118 UU1.24
SPI2_SCK: spi_can.6 UU1.22 | length 53.1
  Top Layer w0.254: spi_can.6 76.327,93.599 87.249,93.599 89.281,95.631 v1(89.281,99.949)
  Bottom Layer w0.254: v1(89.281,99.949) 91.44,97.79 91.44,93.599 92.456,92.583 93.98,92.583 95.377,93.98 95.377,104.394 97.536,106.553 98.825,106.553 UU1.22
temp_data: Temp_Sensor.2 UU1.5 | length 10.8
  Top Layer w0.254: UU1.5 136.071,119.815 138.557,122.301 140.081,122.301 Temp_Sensor.2
  Bottom Layer w0.254: Temp_Sensor.2@143.764,125.73 Temp_Sensor.2@143.764,126.111
VBAT: D1.1 u5.3 | length 7.5
  Top Layer w0.8: u5.3 179.832,105.283 181.864,107.315 D1.1
Vin: D1.2 ON/OFF?.2 POWER1.1 | length 24.4
  Top Layer w0.8: POWER1.1 189.702,113.32 D1.2
  Bottom Layer w0.8: ON/OFF?.2 176.276,117.348 181.102,112.522 186.944,112.522 POWER1.1
WOL: Ethernet_module.3
XCL: MPU6050.6
XDA: MPU6050.5
pads on no net: ON/OFF?.3 ON/OFF?.M spi_can.7 UU1.2 UU1.3 UU1.4 UU1.17 UU1.30 UU1.36 UU1.38

## Polygon pours and split planes (outlines as drawn)
GND on Bottom Layer "1" (solid, pour order 9): 63.119,38.354 63.119,129.286 195.326,129.286 195.326,38.608 195.072,38.354
GND on Top Layer "1" (solid, pour order 11): 63.119,128.905 194.691,128.905 195.072,129.286 195.072,38.481 194.945,38.354 63.119,38.354

## Keep-outs
Keep-Out Layer:
  the board outline again, w0.1

## Text inside footprints (layer, text, board x,y; h text height)
C2: Top Overlay "+" at 184.696,97.651 h1.5 r180
C8: Top Overlay "+" at 158.865,95.871 h1.5 r90
Ethernet_module: Top Overlay "10" at 136.017,95.631 h1.27; Top Overlay "9" at 136.017,97.917 h1.27; Top Overlay "1" at 104.775,96.901 h1.27; Top Overlay "2" at 104.267,94.615 h1.27
"sim_800c_header b": Top Overlay "SIM800" at 138.938,85.598 h1.52 r270